# Altium PCB crossed_dipole_matching.PcbDoc
Units mm, origin at the board's own origin, x right, y up, seen from the top; angles counter-clockwise.
Board outline 100 x 100 mm, 4 copper layers (Top Layer, GND_Top, GND_Bot, Bottom Layer), stack 0.602 mm thick; 21 components, 11 nets, 60 pads, 13 vias.
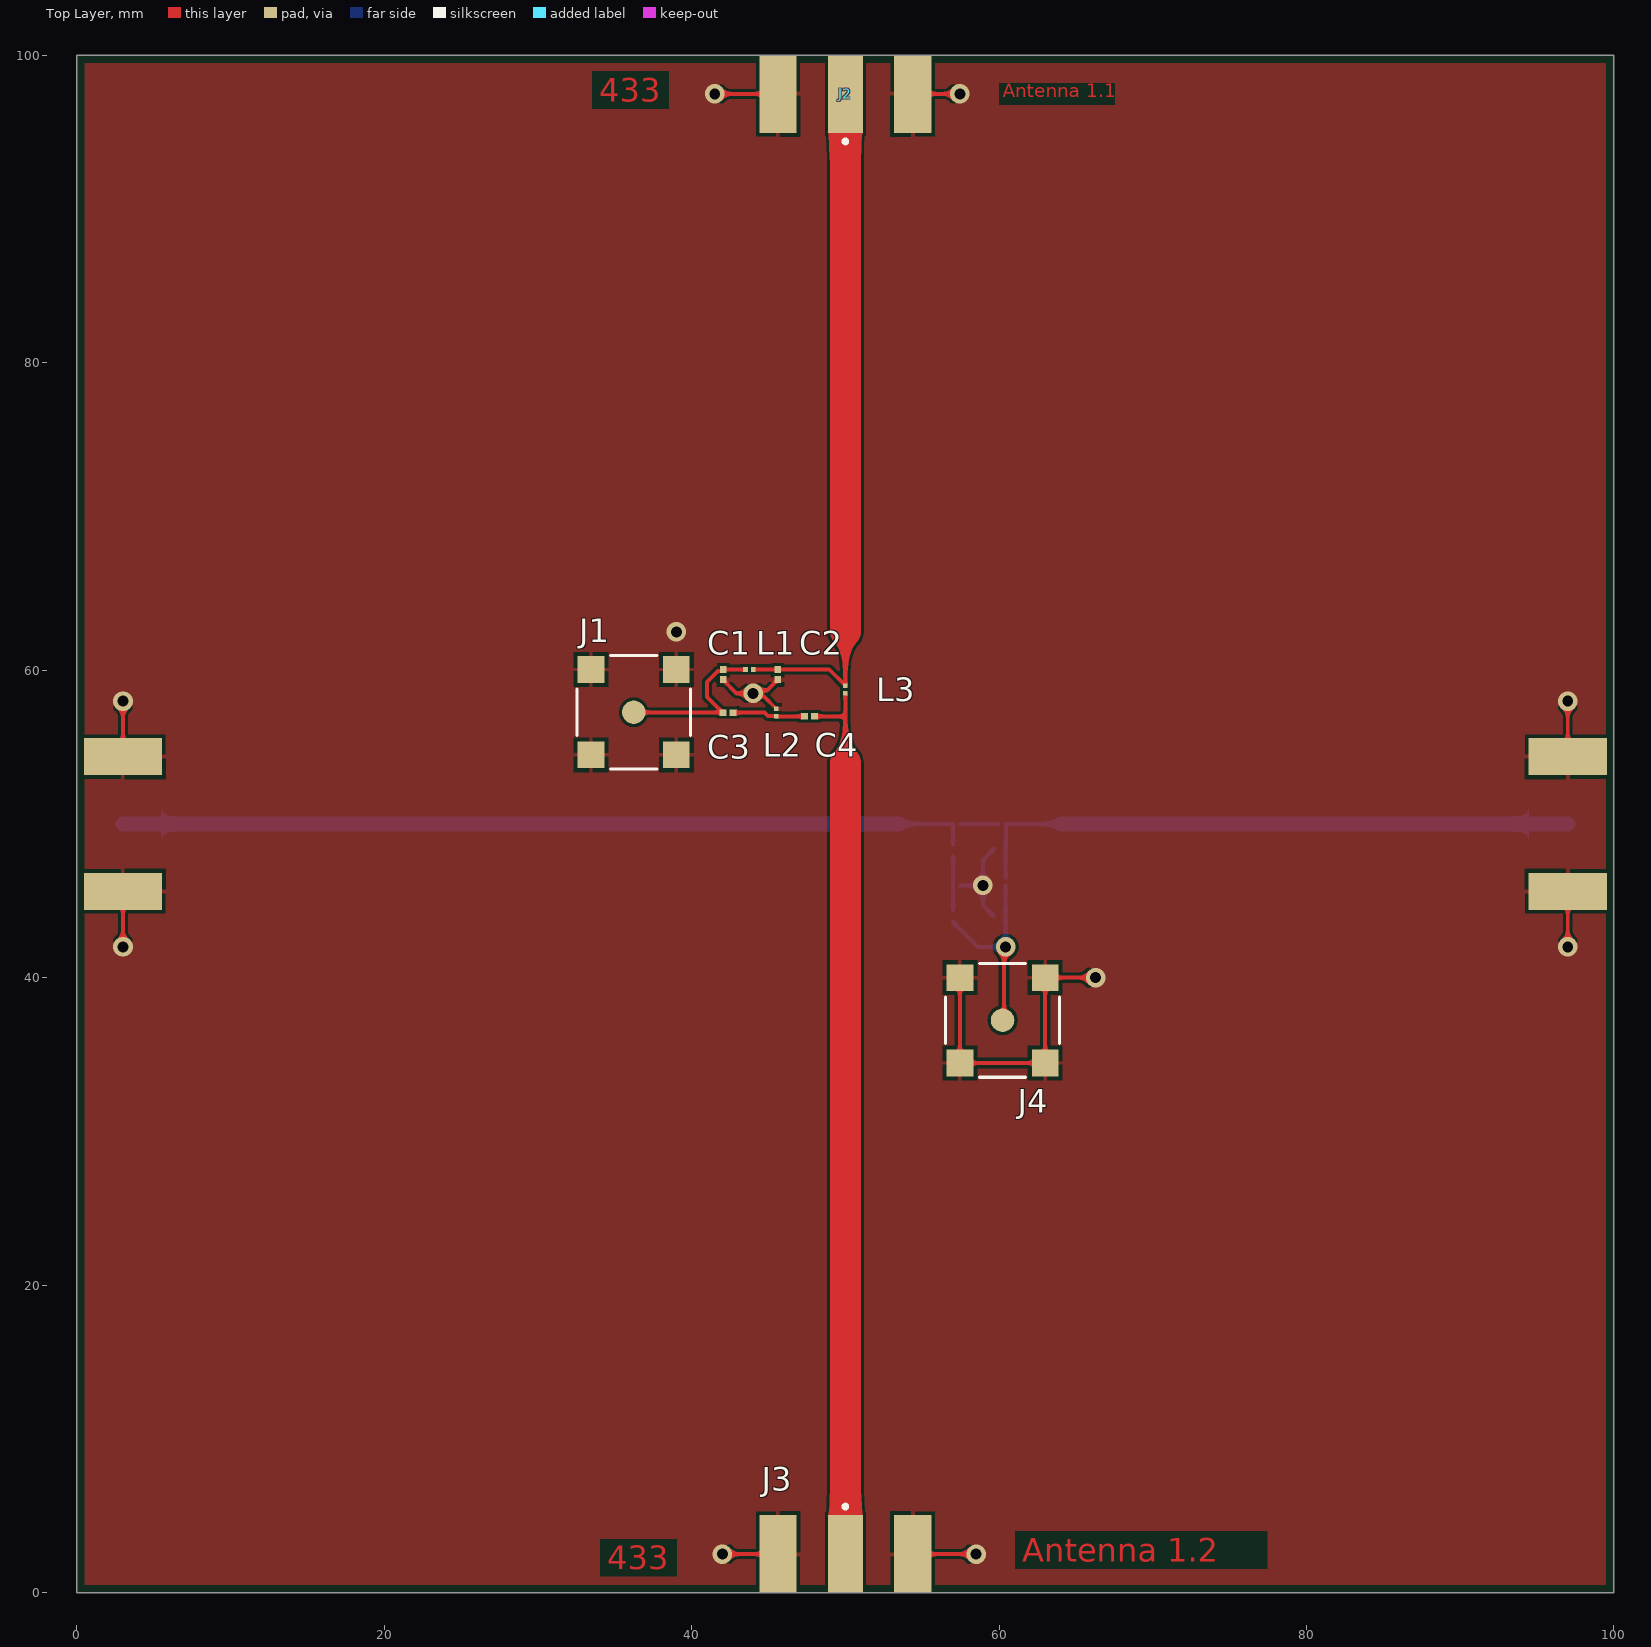
[diagram p0: Top Layer view]
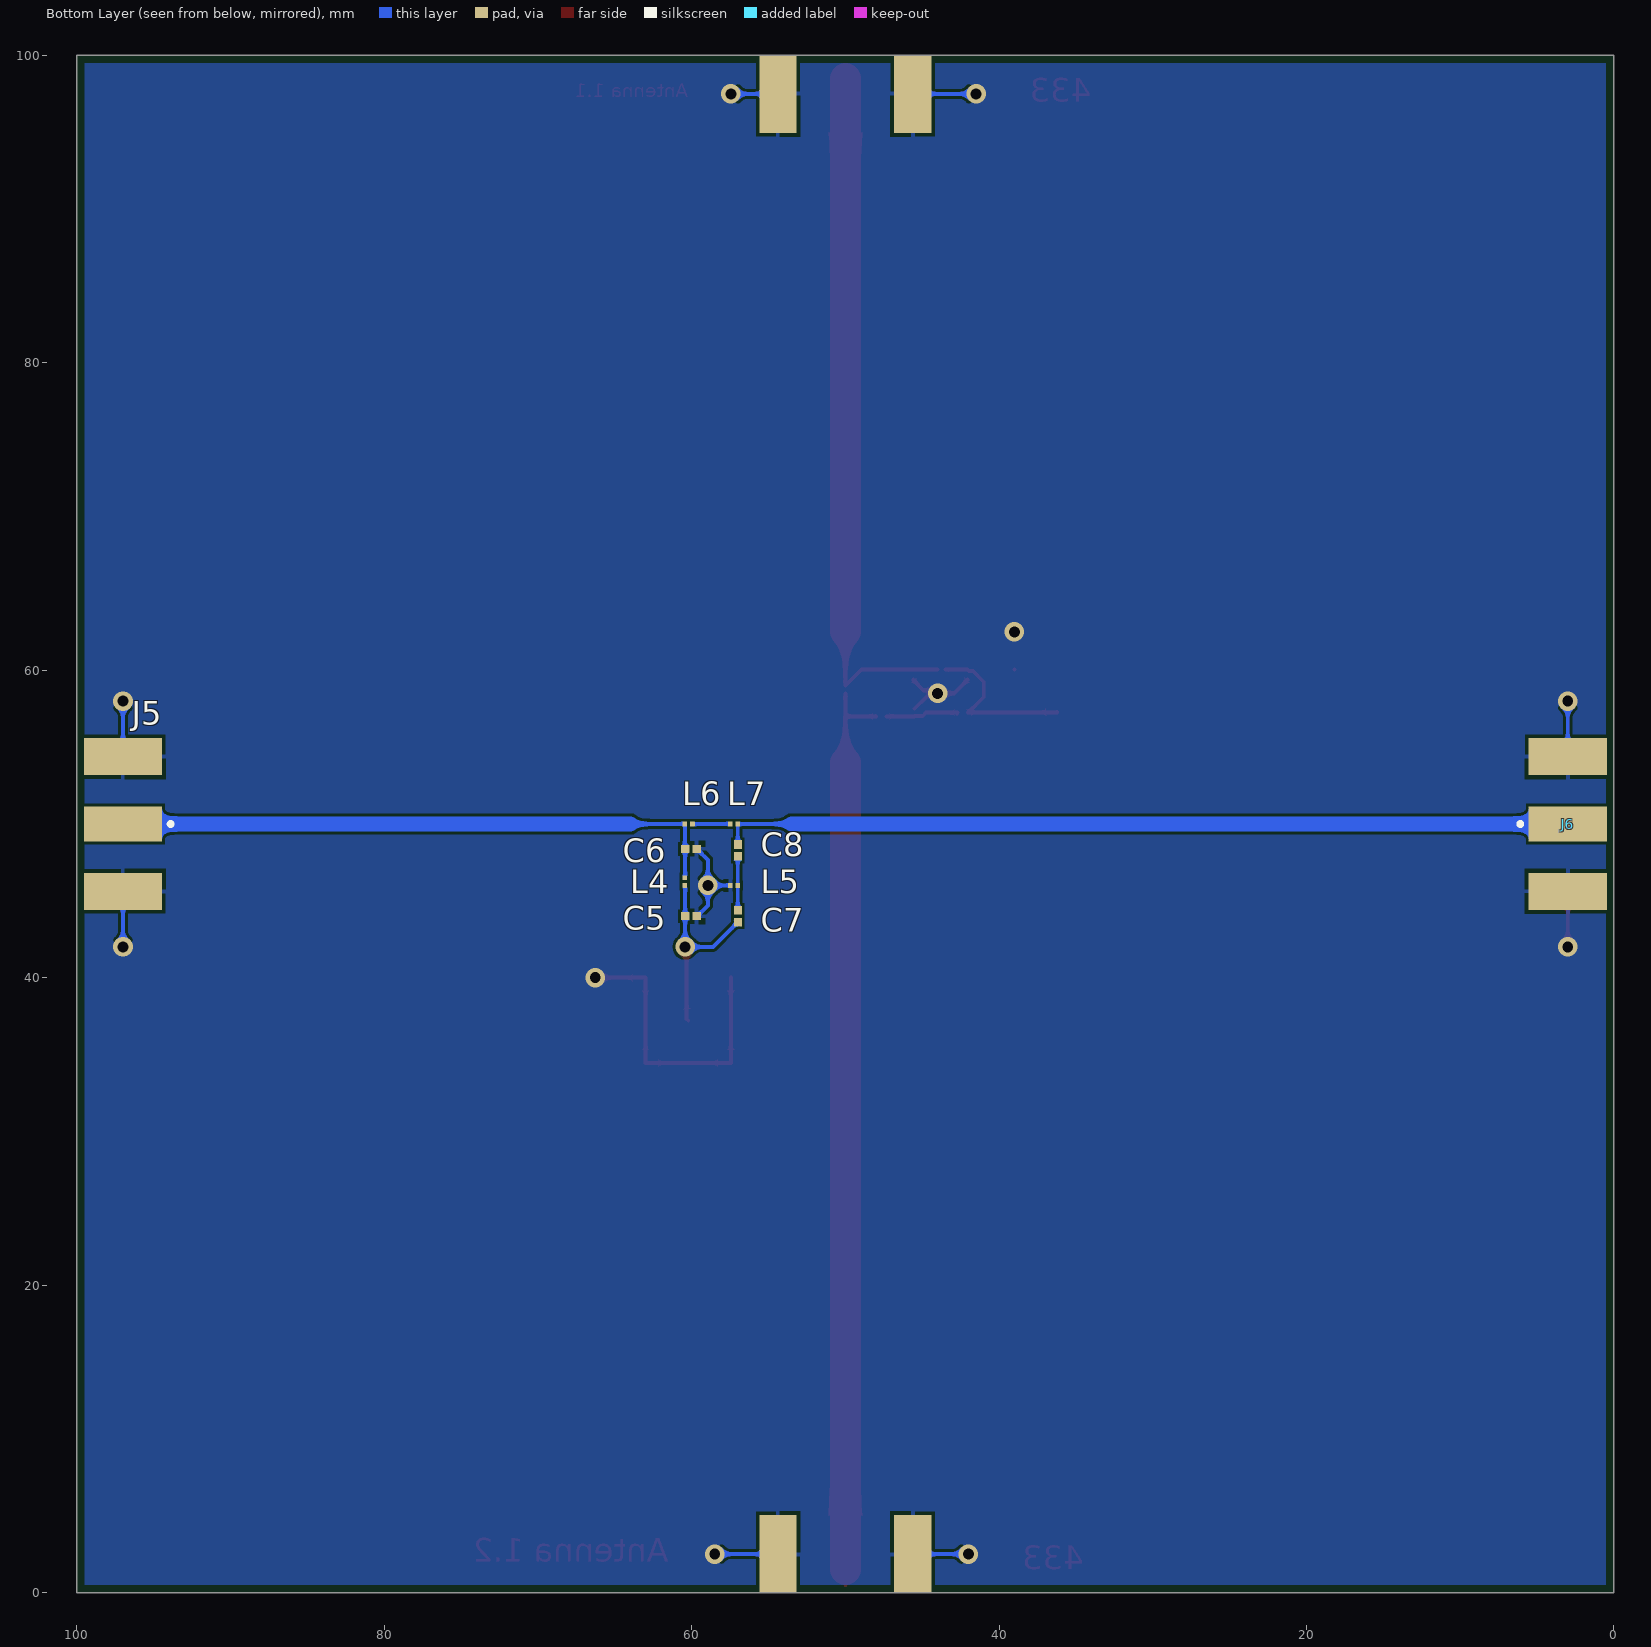
[diagram p1: Bottom Layer view, seen from below]
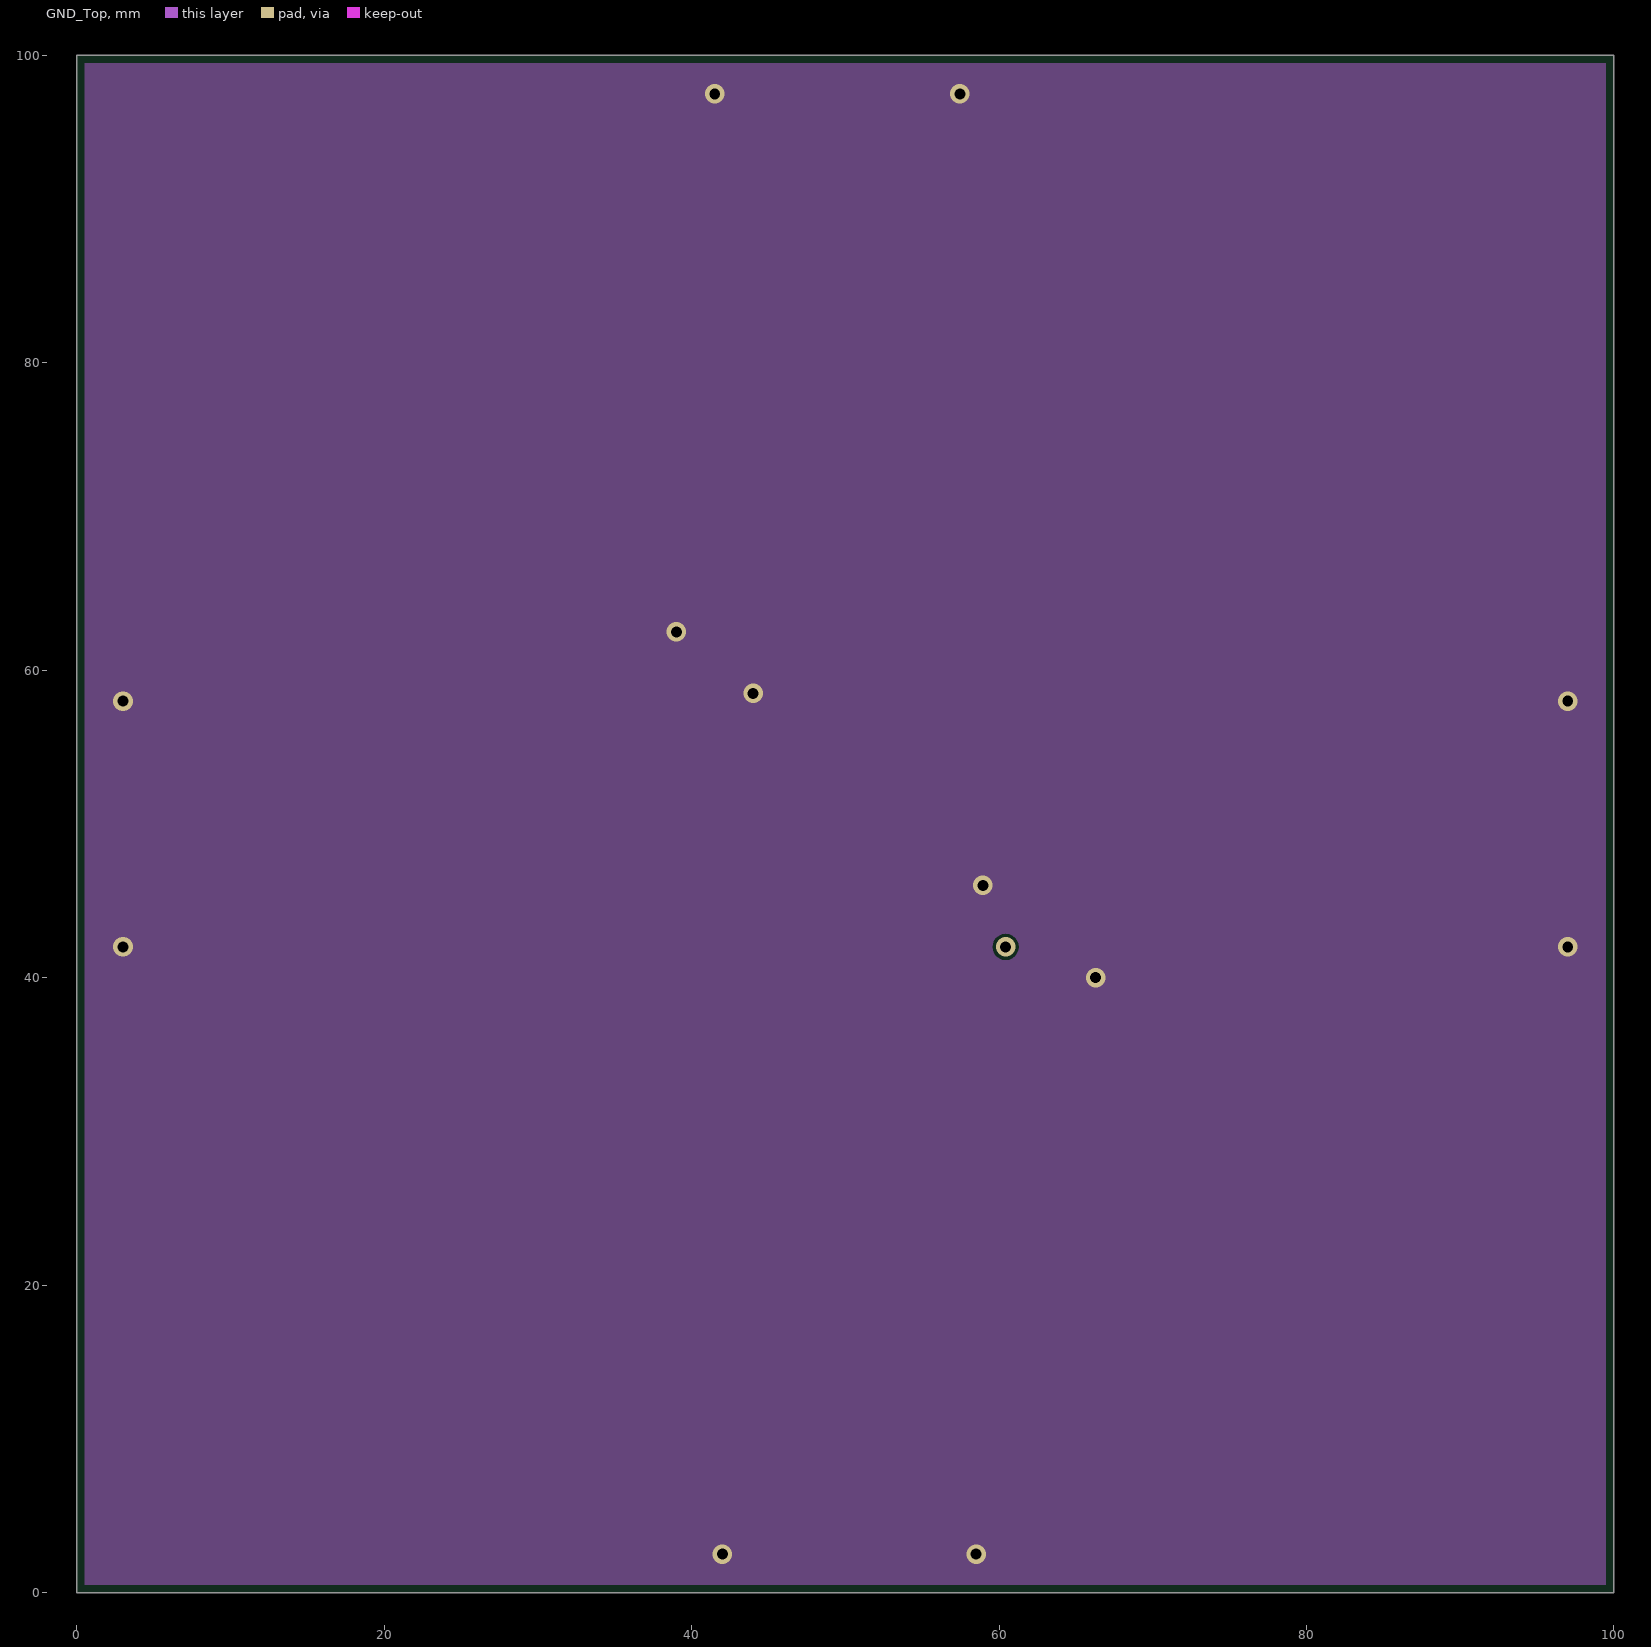
[diagram p2: GND_Top]
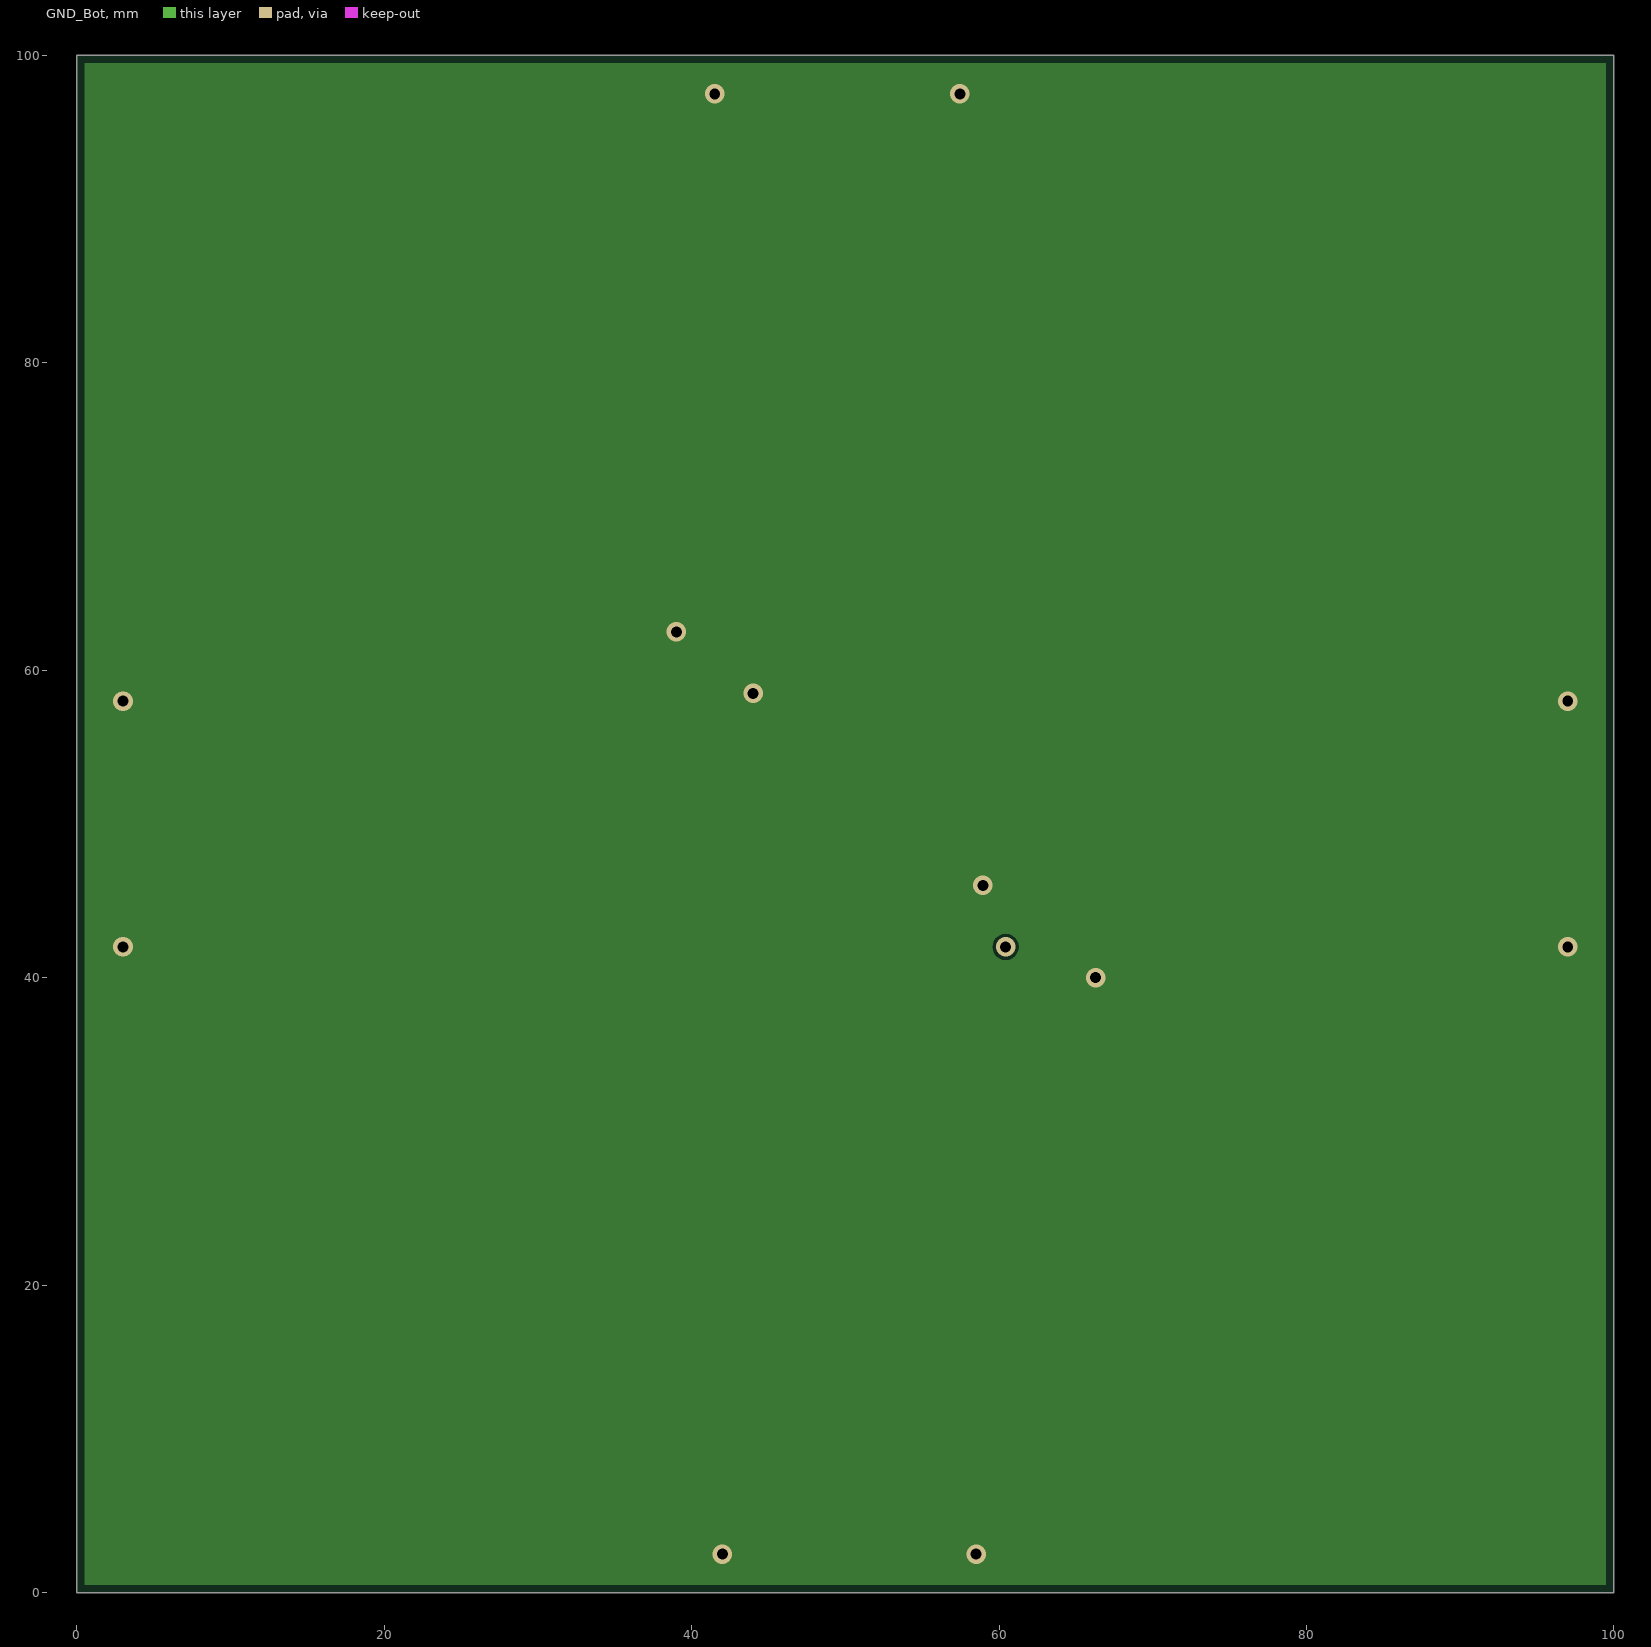
[diagram p3: GND_Bot]
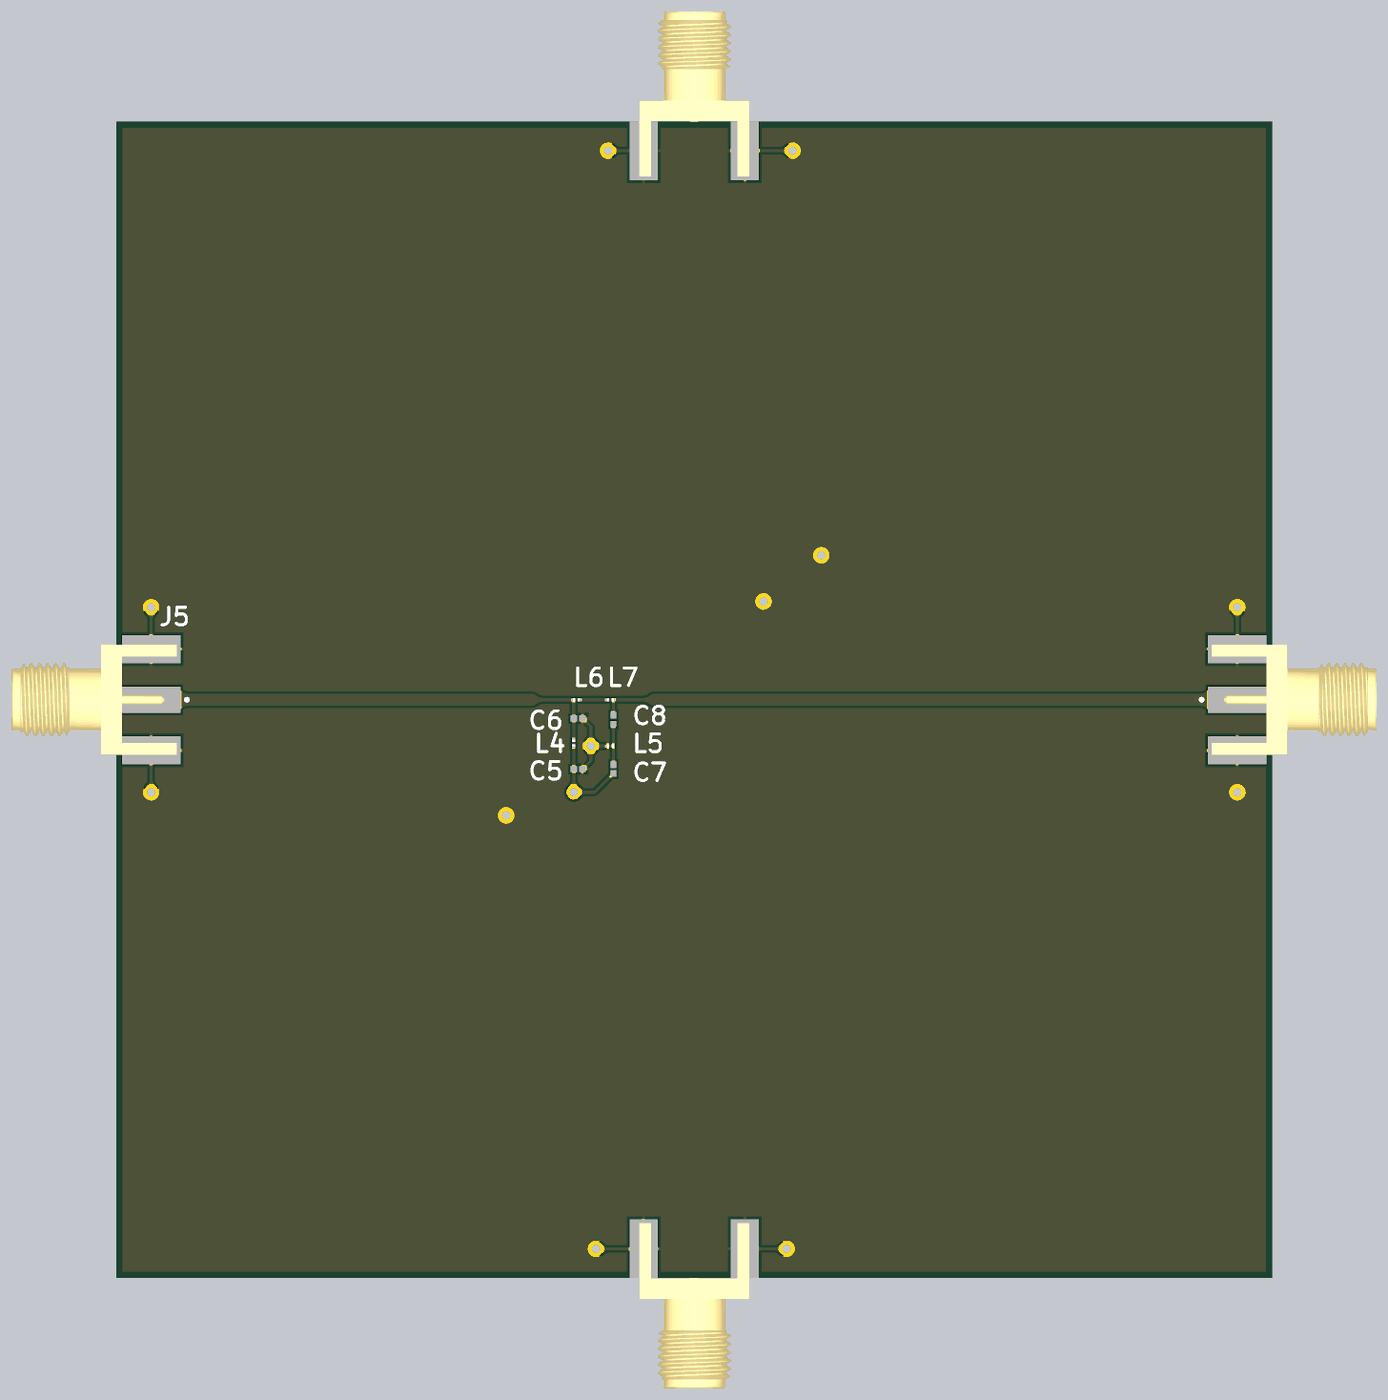
[diagram p4: 3D render of the assembled board from below, using the file's embedded part models]

## Layer stack, top to bottom
Top Solder: solder mask 0.0102, Solder Resist, Dk 3.5
Top Layer: signal copper 0.035
Dielectric 2: prepreg 0.0711, PP-006, Dk 4.1
GND_Top: signal copper 0.035
Dielectric 1: dielectric 0.32, FR-4, Dk 4.8
GND_Bot: signal copper 0.035
Dielectric 3: prepreg 0.0711, PP-006, Dk 4.1
Bottom Layer: signal copper 0.035
Bottom Solder: solder mask 0.0102, Solder Resist, Dk 3.5

## Board outline
0,0 100,0 100,100 0,100

## Design rules (kind name [scope] priority, off if disabled: settings)
BoardOutlineClearance [All] p1: gap=0.508 ignorepadtopadclearanceinfootprint=FALSE except(0: Arc-SplitContinuation Track-SplitContinuation SMDPad-SplitContinuation THPad-SplitContinuation Via-SplitContinuation Fill-SplitContinuation Poly-SplitContinuation Region-SplitContinuation Text-SplitContinuation; 0.254: Text-OutlineEdge Text-CavityEdge Text-CutoutEdge Text-SplitBarrior)
Clearance [All] p1: gap=0.203 ignorepadtopadclearanceinfootprint=FALSE
HoleSize [All] p1: absolutevalues=TRUE maxlimit=2.54 minlimit=0.25 maxpercent=80.000 minpercent=20.000
MinimumAnnularRing [All] p1: minimumring=0.203
MinimumSolderMaskSliver [All] p1: minsoldermaskwidth=0.102
PolygonConnect PolygonConnect_1 [All vs IsVia] p1: connectstyle=Direct reliefconductorwidth=0.254 reliefentries=4 polygonreliefangle="90 Angle" airgapwidth=0.254
PolygonConnect PolygonConnect_2 [All vs HasFootprint('QFN 3X3')] p2: thpad.connectstyle=Direct thpad.reliefconductorwidth=0.254 thpad.reliefentries=4 thpad.polygonreliefangle="90 Angle" thpad.airgapwidth=0.254 smdpad.connectstyle=Relief smdpad.reliefconductorwidth=0.254 smdpad.reliefentries=4 smdpad.polygonreliefangle="90 Angle" smdpad.airgapwidth=0.254 via.connectstyle=Direct via.reliefconductorwidth=0.254 via.reliefentries=4 via.polygonreliefangle="90 Angle" via.airgapwidth=0.254
PolygonConnect PolygonConnect_3 [All vs HasFootprint('HDR1X2_LGE1.0')] p3: connectstyle=Relief reliefconductorwidth=0.635 reliefentries=4 polygonreliefangle="90 Angle" airgapwidth=0.254
PolygonConnect [All] p4: connectstyle=Relief reliefconductorwidth=0.254 reliefentries=4 polygonreliefangle="90 Angle" airgapwidth=0.254
RoomDefinition Room_Antenna2.2 [HasFootprint('WE-TMSB 0201')] p1: confinementstyle=ConfineIn formatcopy=TRUE lockcomponents=FALSE outline 97,51.5 64.5,51.5 64.5,48.392 97,48.392
RoomDefinition Room_Antenna2.1 [HasFootprint('WE-TMSB 0201')] p2: confinementstyle=ConfineIn formatcopy=TRUE lockcomponents=FALSE outline 3,51.5 53.5,51.5 53.5,48.663 3,48.663
RoomDefinition Room_Antenna1.1 [HasFootprint('WE-TMSB 0201')] p3: confinementstyle=ConfineIn formatcopy=TRUE lockcomponents=FALSE outline 48.5,0 51.5,0 51.5,54 48.5,54
RoomDefinition Room_Antenna1.2 [HasFootprint('WE-TMSB 0201')] p4: confinementstyle=ConfineIn formatcopy=TRUE lockcomponents=FALSE outline 48.5,100 51.5,100 51.5,62.5 48.5,62.5
RoutingVias [All] p1: holewidth=0.711 width=1.27 viastyle="Through Hole" minholewidth=0.711 minwidth=1.27 maxholewidth=0.711 maxwidth=1.27
ShortCircuit ShortCircuit_Antenna1.2 [InNet('NetC4_2') vs InNet('Antenna_1.2')] p1: allowed=TRUE
ShortCircuit [All] p2: allowed=FALSE
SilkToSilkClearance [All] p1: silktosilkclearance=0.203
SolderMaskExpansion [All] p1: expansion=0.076
Width Width_Antenna2 [TouchesRoom('Room_Antenna2.1') OR TouchesRoom('Room_Antenna2.2')] p1: maxlimit=1 minlimit=0.9 preferedwidth=1
Width Width_Antenna1 [TouchesRoom('Room_Antenna1.1') OR TouchesRoom('Room_Antenna1.2')] p2: maxlimit=2 minlimit=1.5 preferedwidth=2
Width [All] p3: maxlimit=3.81 minlimit=0.254 preferedwidth=0.254
26 further rules are at their usual default settings.

## Components (designator, comment, footprint, x,y, rotation, side; value= is the part's Value field where it differs from the comment)
C1 "CAP 4.1pF 50V 0201(0603)" CAPC0201(0603)33_N 42.056,59.72 r270 top value=4.1pF
C2 "CAP 4.1pF 50V 0201(0603)" CAPC0201(0603)33_N 45.585,59.72 r270 top value=4.1pF
C3 "CAP 4.1pF 50V 0201(0603)" CAPC0201(0603)33_N 42.358,57.247 r0 top value=4.1pF
C4 "CAP 4.1pF 50V 0201(0603)" CAPC0201(0603)33_N 47.67,57 r0 top value=4.1pF
C5 "CAP 18pF 25V 0201(0603)" CAPC0201(0603)33_M 60.047,44 r180 bottom value=18pF
C6 "CAP 18pF 25V 0201(0603)" CAPC0201(0603)33_M 60.047,48.38 r180 bottom value=18pF
C7 "CAP 18pF 25V 0201(0603)" CAPC0201(0603)33_M 57,44 r90 bottom value=18pF
C8 "CAP 18pF 25V 0201(0603)" CAPC0201(0603)33_M 57,48.283 r90 bottom value=18pF
J1 "CONSMA002-SMD" CON-SMA-SMD-RA 36.225,57.275 r0 top
J2 "142-0701-801" CINC-142-0701-801_V 50,97.5 r90 top
J3 "142-0701-801" CINC-142-0701-801_V 50,2.5 r270 top
J4 "CONSMA002-SMD" CON-SMA-SMD-RA 60.225,37.225 r180 top
J5 "142-0701-801" CINC-142-0701-801_V 97,50 r0 bottom
J6 "142-0701-801" CINC-142-0701-801_V 3,50 r180 bottom
L1 "IND 33NH 120MA 2.95 OHM" "WE-TMSB 0201" 43.75,60.05 r0 top
L2 "IND 33NH 120MA 2.95 OHM" "WE-TMSB 0201" 45.5,57.25 r90 top
L3 "IND 39NH 120MA 3 OHM" "WE-TMSB 0201" 50,58.75 r270 top
L4 "IND 68NH 100MA 8 OHM" "WE-TMSB 0201" 60.45,46.25 r90 bottom
L5 "IND 68NH 100MA 8 OHM" "WE-TMSB 0201" 57.25,46 r0 bottom
L6 "IND 160NH 70MA" "WE-TMSB 0201" 60.2,50 r180 bottom
L7 "IND 270NH 60MA" "WE-TMSB 0201" 57.25,50 r180 bottom

## Footprints (in the part's own frame and the unit in brackets; to place one, negate y for a bottom-side part, rotate by r counter-clockwise, add the part's x,y. Pads: shape width x height; smd on the part's side, far side on the other; paste and mask are expansions set on the pad)
CAPC0201(0603)33_M [mm] "Chip Capacitor, Body 0.6x0.3mm, Height 0.33mm, IPC Low Density"
  rect 0.56x0.52 smd: 1(-0.38,0) 2(0.38,0)
  body extent -0.31,-0.17 0.32,0.16, height 0.33
CAPC0201(0603)33_N [mm] "Chip Capacitor, Body 0.6x0.3mm, Height 0.33mm, IPC Medium Density"
  rect 0.46x0.42 smd: 1(-0.33,0) 2(0.33,0)
  body extent -0.31,-0.16 0.32,0.17, height 0.33
CINC-142-0701-801_V [mil] "SMA Connector, 5-Leads, Body 14.275x9.525mm"
  rect 200x90 smd: 1(0,0)
  rect 200x95 smd: 2(0,172.5) 3(0,-172.5)
  rect 200x95 smd far side: 4(0,172.5) 5(0,-172.5)
  silkscreen extent -127,-5 -117,5, body extent -87,-187 475,188, height 171
CON-SMA-SMD-RA [mil] "Connector, SMA Female, 5-Lead, SM, Right-Angle, Body 7x7mm"
  round 60 smd: 1(0,0)
  rect 68.5x68.5 smd: 2(-109.25,109.25) 3(109.25,109.25) 4(109.25,-109.25) 5(-109.25,-109.25)
  silkscreen extent -146,-146 146,146
"WE-TMSB 0201" [mm] "Chip Inductor, 2-Leads, Body 0.6x0.3mm, IPC Medium Density"
  rect 0.3x0.3 smd: 1(-0.25,0) 2(0.25,0)
  body extent -0.3,-0.15 0.3,0.15, height 0.28

## Part data
C1 C2 C3 C4: library part CMP-1033-00144-1, "CAP 4.1pF 50V ±0.25pF 0201 (0603 Metric) Thickness 0.33mm SMD", Case-EIA=0201, Case-Metric=0603, Rated Voltage="50 V", Tolerance=±0.25pF, Max Thickness="0.33 mm", Technology=SMT
C5 C6 C7 C8: library part CMP-1033-00391-1, "CAP 18pF 25V ±2% 0201 (0603 Metric) Thickness 0.33mm SMD", Case-EIA=0201, Case-Metric=0603, Rated Voltage="25 V", Tolerance=±2%, Max Thickness="0.33 mm", Technology=SMT
J1 J4: library part CMP-0168-00021-1, "SMA Female Right Angle Surface Mount Connector", DatasheetVersion="revB, Oct-2010", PackageDescription="SMA Female Right Angle, Surface Mount Connector, 7 x 7 mm Body", PackageReference=CON-SMA-SMD-RA, PackageVersion="revB, Oct-2010"
J2 J3 J5 J6: library part CMP-2000-05490-1, "SMA End Launch Jack Receptacle, 50 Ohm, 0 to 18 GHz, -65 to 165 degC, 5-Pin SMD, RoHS, Bulk", Manufacturer=EmersonConnectivitySolutions, Maximum Frequency=18GHz, Operating Temperature Range=-65Cto+165C, Package Description="5-Pin Surface Mount Device, Body 14.275 x 9.525 mm", Body Material=Brass, Body Style=Straight, Brand=Johnson/EmersonConnectivitySolutions, Connector Type=JackPCB, Contact Plating=Gold, Datasheet URL=https://belfuse.com/resources/Johnson/productinformation/pi-142-0701-801.pdf, Datasheet Version=12/2014, Factory Pack Quantity=5, Gender=Jack(Female), Impedance=50Ohms, Manufacturer URL=http://www.cinch.com/, Mounting Technology=SurfaceMount, Orientation=Straight, Package Reference=142-0701-801, Package URL=https://belfuse.com/resources/Johnson/drawings/dr-1420701801.pdf, Product=Connectors, Product Category=RFConnectors/CoaxialConnectors, RF Series=SMA, RoHS=Details, Series=SMA, Termination Style=Solder
L1 L2 L3 L4 L5 L6 L7: library part CMP-1490-00002-1, "Tiny Multilayer Suppression  Bead  WE-TMSB, Z= 120 Ohm", Manufacturer="Wuerth Elektronik", PartNumber=742692003, ComponentLink1Description="Manufacturer URL", ComponentLink1URL=http://www.we-online.com, ComponentLink2Description=Datasheet, ComponentLink2URL=http://www.we-online.de/katalog/media/pdf/742692003.pdf, Impedance="120 Ohm", PackageReference="WE-TMSB 0201"

## Via types
v1: diameter 1.27, hole 0.711, Top Layer to Bottom Layer, 13 vias

## Nets (pads, with @x,y where several pads share a name; then routed paths per layer and width w, separated by ;. In a path a pad name is that pad's centre, name@x,y a point inside that pad or via, vN(x,y) a via of type N, cw(c..) or ccw(c..) an arc to the next point about the centre after c; other vN are vias at no path point)
Antenna_1.2: 
GND: C1.2 C2.2 C5.2 C6.2 J1.2 J1.3 J1.4 J1.5 J2.2 J2.3 J2.4 J2.5 J3.2 J3.3 J3.4 J3.5 J4.2 J4.3 J4.4 J4.5 J5.2 J5.3 J5.4 J5.5 J6.2 J6.3 J6.4 J6.5 L2.2 L5.2 | length 87.9
  Top Layer w0.254: v1(3,42) J6.5 ; J6.4 v1(3,58) ; v1(41.5,97.5) J2.2 ; v1(42,2.5) J3.3 ; C1.2 42.056,59.37 42.926,58.5 v1(44,58.5) ; L2.2 44.694,58.306 44.194,58.306 v1(44,58.5) ; C2.2@45.502,59.307 C2.2 45.585,59.37 44.91,58.694 44.194,58.694 v1(44,58.5) ; J3.2 v1(58.5,2.5) ; J2.3 v1(57.45,97.5) ; J4.4 J4.3 J4.2 J4.5 v1(66.275,40) ; v1(97,42) J5.4 ; J5.5 v1(97,58)
  Bottom Layer w0.254: J6.2 v1(3,58) ; v1(41.5,97.5) J2.4 ; v1(42,2.5) J3.5 ; J3.4 v1(58.5,2.5) ; J2.5 v1(57.45,97.5) ; L5.2 v1(58.95,46) ; C5.2 59.647,44 58.95,44.697 v1(58.95,46) ; C6.2 59.647,48.38 59.514,48.247 59.514,48.227 58.95,47.663 v1(58.95,46) ; v1(97,42) J5.2 ; J5.3 v1(97,58)
  other v1: 39,62.5
NetC1_1: C1.1 C3.1 J1.1 L1.1 | length 11.1
  Top Layer w0.254: J1.1 36.239,57.261 C3.1@41.994,57.261 ; C3.1 42.008,57.247 C3.1@41.994,57.261 ; L1.1 C1.1 42.056,60.033 41.973,59.95 41.709,59.95 41,59.241 41,58.255 C3.1@41.994,57.261
NetC2_1: C2.1 J2.1 L1.2 L3.1 | length 46.9
  Top Layer w0.254: L1.2 C2.1 48.95,60.05 L3.1 50,62.5 ; J2.1 J2.1@50,98.5
  Top Layer w2: 50,62.5 J2.1 J2.1@50,98.5
NetC3_2: C3.2 C4.1 L2.1 | length 4.8
  Top Layer w0.254: C3.2@42.744,57.191 C3.2 44.745,57.247 44.969,57.023 45.477,57.023 L2.1 C4.1
NetC4_2: C4.2 J3.1 L3.2 | length 60
  Top Layer w0.254: C4.2@48.023,57.023 C4.2 50,57 ; J3.1@50,0.5 J3.1@50,1.5 ; 50,54 50,57 ; L3.2 50,57
  Top Layer w2: J3.1@50,1.5 J3.1 50,54
NetC5_1: C5.1 C7.1 J4.1 L4.1 | length 13
  Top Layer w0.254: J4.1 60.326,37.326 60.326,41.899 v1(60.427,42)
  Bottom Layer w0.254: C7.1 57,43.6 57.133,43.467 57.153,43.467 58.62,42 60.307,42 60.367,42.06 v1(60.427,42) C5.1 60.427,45.977 L4.1
NetC6_1: C6.1 J5.1 L4.2 L6.1 | length 40.1
  Bottom Layer w0.254: L4.2 60.427,46.523 C6.1 60.439,48.392 60.439,49.988 L6.1 64,50
  Bottom Layer w1: 64,50 J5.1
NetC7_2: C7.2 C8.1 L5.1 | length 3.5
  Bottom Layer w0.254: C7.2 L5.1 C8.1
NetC8_2: C8.2 J6.1 L7.2 | length 55.3
  Bottom Layer w0.254: 53.5,50 L7.2 C8.2
  Bottom Layer w1: J6.1 53.5,50
NetL6_2: L6.2 L7.1 | length 2.5
  Bottom Layer w0.254: L7.1 L6.2

## Polygon pours and split planes (outlines as drawn)
GND on GND_Top (solid, pour order 38): 100,0 0,0 0,100 100,100
no net on GND_Top "GND-No Net" (solid, pour order 4): 0,99.5
no net on Top Layer (solid, pour order 42): -8.5,84
GND on Top Layer (solid, pour order 40): 100,100 100,0 0,0 0,100
no net on Top Layer "Top Layer-No Net" (solid, pour order 34): 52.5,62
no net on Top Layer "Top Layer-No Net 1" (solid, pour order 12): 50,60.05
GND on Bottom Layer (solid, pour order 46): 0,100 100,100 100,0 0,0
GND on GND_Bot (solid, pour order 48): 100,100 0,100 0,0 100,0

## Other copper
Top Layer:
  text "433" at 34,97 h1.52
  text "Antenna 1.1" at 60.225,97 h1.52
  text "Antenna 1.2" at 61.5,2 h1.52
  text "433" at 34.5,1.5 h1.52